# Altium PCB Copy of PCB1.PcbDoc
Units mil, origin at the board's own origin, x right, y up, seen from the top; angles counter-clockwise.
Board outline 2390 x 329.09 mil, 4 copper layers (Top Layer, Layer 2, Layer 3, Bottom Layer), stack 23.756 mil thick; 2 components, 3 nets, 9 pads, 0 vias.
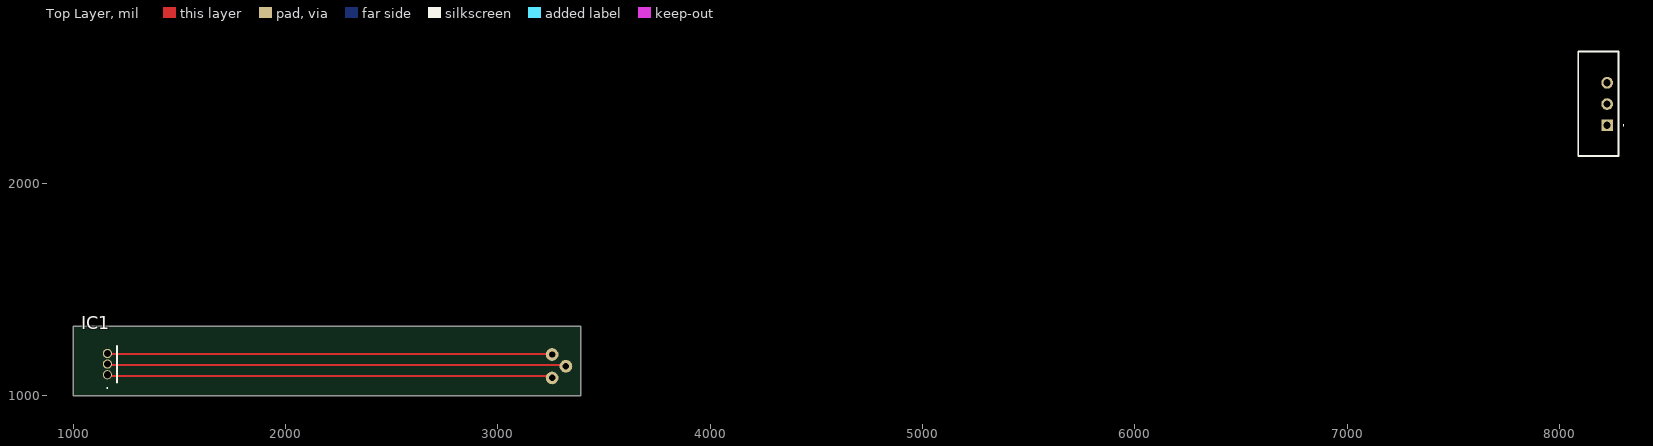
[diagram p0: Top Layer view]
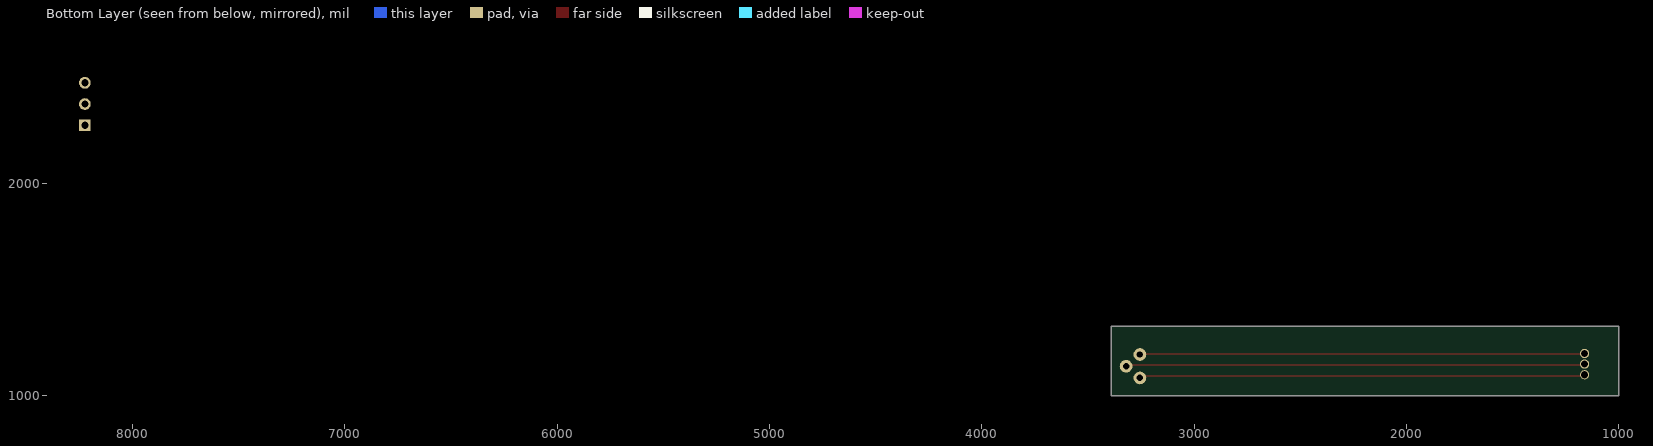
[diagram p1: Bottom Layer view, seen from below]
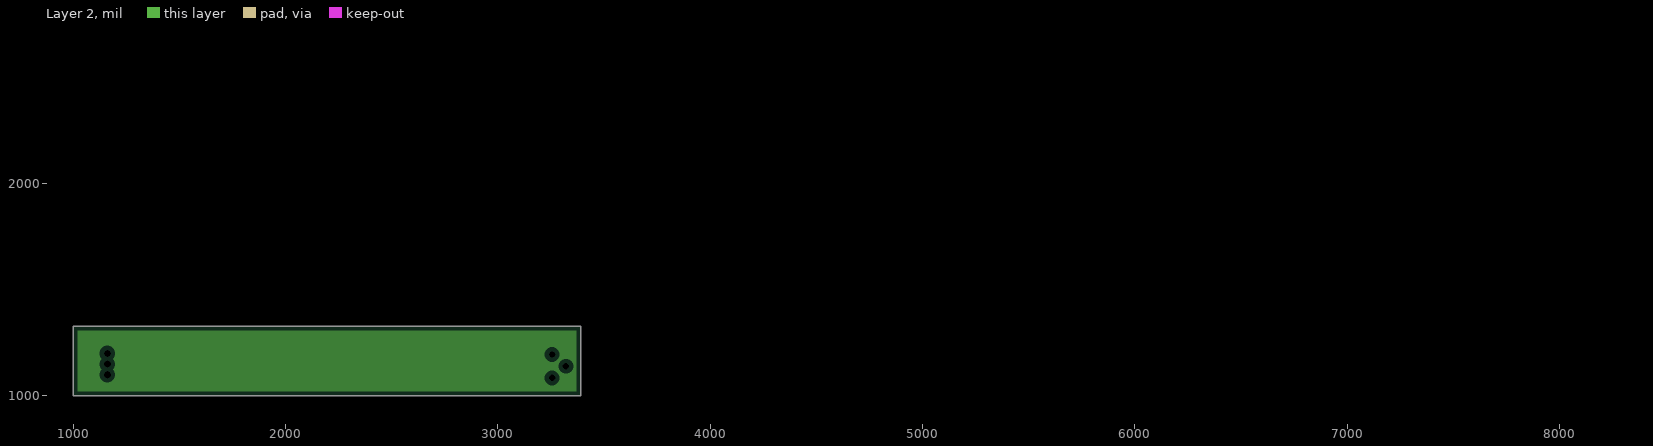
[diagram p2: Layer 2, clearances drawn from the general rule]
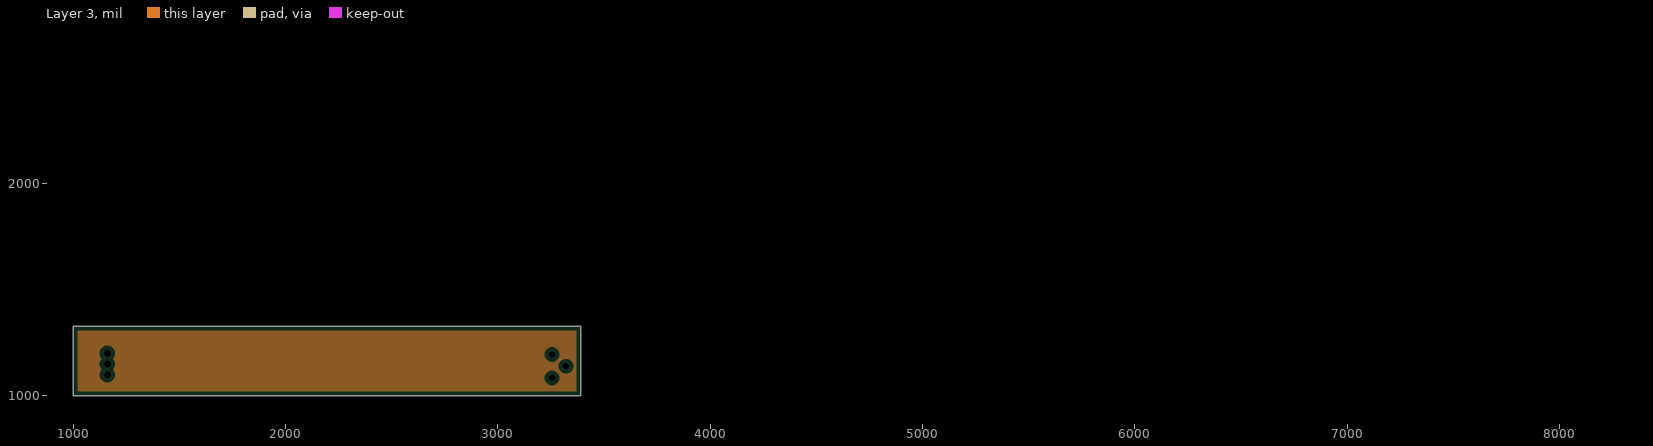
[diagram p3: Layer 3, clearances drawn from the general rule]

## Layer stack, top to bottom
Top Solder: solder mask 0.4724, FC-001, Dk 4
Top Solder: solder mask 0.4, Solder Resist, Dk 3.5
Top Layer: signal copper 1.4
Dielectric 2: prepreg 2.8, PP-006, Dk 4.1
Layer 2: plane copper 1.378
Dielectric 1: prepreg 12.6, FR-4, Dk 4.1
Layer 3: plane copper 1.378
Dielectric 3: prepreg 2.8, PP-006, Dk 4.1
Bottom Layer: signal copper 1.4
Stack2 Bottom Coverlay: solder mask 0.4, Solder Resist, Dk 3.5
Stack2 Bottom Coverlay: solder mask 0.4724, FC-001, Dk 4

## Board outline
1000,1000 3390,1000 3390,1329.09 1000,1329.09

## Design rules (kind name [scope] priority, off if disabled: settings)
Clearance [All] p1: gap=10 ignorepadtopadclearanceinfootprint=FALSE
DiffPairsRouting [All] p1: maxlimit=10 minlimit=10 mostfreqgap=10 toplayer_minwidth=15 toplayer_maxwidth=15 toplayer_prefwidth=15 bottomlayer_minwidth=15 bottomlayer_maxwidth=15 bottomlayer_prefwidth=15 substack1={582C9589-BA87-4CC7-94C1-6AA3926CDF40} toplayer_{582c9589-ba87-4cc7-94c1-6aa3926cdf40}_minwidth=15 toplayer_{582c9589-ba87-4cc7-94c1-6aa3926cdf40}_maxwidth=15 toplayer_{582c9589-ba87-4cc7-94c1-6aa3926cdf40}_prefwidth=15 bottomlayer_{582c9589-ba87-4cc7-94c1-6aa3926cdf40}_minwidth=15 bottomlayer_{582c9589-ba87-4cc7-94c1-6aa3926cdf40}_maxwidth=15 bottomlayer_{582c9589-ba87-4cc7-94c1-6aa3926cdf40}_prefwidth=15 maxuncoupledlength=500
PlaneClearance [All] p1: clearance=20
PlaneConnect [All] p1: planeconnectstyle=Relief reliefexpansion=20 reliefentries=4 reliefconductorwidth=10 reliefairgap=10
PolygonConnect [All] p1: connectstyle=Relief reliefconductorwidth=10 reliefentries=4 polygonreliefangle="90 Angle" airgapwidth=10
RoutingVias [All] p1: holewidth=28 width=50 viastyle="Through Hole" minholewidth=28 minwidth=50 maxholewidth=28 maxwidth=50
SolderMaskExpansion [All] p1: expansion=4 istentingtop=FALSE
Width [All] p1: maxlimit=10 minlimit=10 preferedwidth=10 substack1={582C9589-BA87-4CC7-94C1-6AA3926CDF40}
27 further rules are at their usual default settings.

## Classes and differential pairs
component class Sheet2: IC1

## Components (designator, comment, footprint, x,y, rotation, side; value= is the part's Value field where it differs from the comment)
IC1 "DS18B20+" DS18B20 1160,1150 r90 top
J1 "5-520315-3" 55203153 8225,2275 r90 top

## Footprints (in the part's own frame and the unit in brackets; to place one, negate y for a bottom-side part, rotate by r counter-clockwise, add the part's x,y. Pads: shape width x height; smd on the part's side, far side on the other; paste and mask are expansions set on the pad)
55203153 [mil]
  rect 55.24x55.24 hole 34: 1(0,0)
  round 55.24 hole 34: 2(100,0) 3(200,0)
  silkscreen extent -145,-79 348,136, body extent -141,-54 337,119, height 359
DS18B20 [mm]
  round 1.1 hole 0.85: 1(-1.27,0) 2(0,0) 3(1.27,0)
  silkscreen extent -2.9,-1.14 2.2,0.05, body extent -2.84,-1.1 2.97,3.08, height 5.33

## Part data
IC1: "Integrated Circuit", Manufacturer_Name="Analog Devices", Mouser Part Number=700-DS18B20+, Arrow Part Number=DS18B20+, Arrow Price/Stock=https://www.arrow.com/en/products/ds18b20/analog-devices?utm_currency=USD&region=nac, Datasheet Link=https://ms.componentsearchengine.com/Datasheets/2/DS18B20+.pdf, Height=4.95mm, Manufacturer_Part_Number=DS18B20+, Mouser Price/Stock=https://www.mouser.co.uk/ProductDetail/Analog-Devices-Maxim-Integrated/DS18B20%2b?qs=7H2Jq%252ByxpJKegCKabDbglA%3D%3D
J1: "Connector", Manufacturer_Name="TE Connectivity", Mouser Part Number=571-5-520315-3, Arrow Part Number=5-520315-3, Arrow Price/Stock=https://www.arrow.com/en/products/5-520315-3/te-connectivity?utm_currency=USD&region=nac, Datasheet Link=https://www.te.com/commerce/DocumentDelivery/DDEController?Action=showdoc&DocId=Customer+Drawing%7F520315%7FU4%7Fpdf%7FEnglish%7FENG_CD_520315_U4.pdf%7F5-520315-3, Height=6.93mm, Manufacturer_Part_Number=5-520315-3, Mouser Price/Stock=https://www.mouser.co.uk/ProductDetail/TE-Connectivity-AMP/5-520315-3?qs=lnVw2K6okukuuQdbziEh6w%3D%3D

## Free pads (board coordinates)
  round 60 hole 30: 1(3255,1195) 3(3320,1140) 4(3255,1085)

## Nets (pads, with @x,y where several pads share a name; then routed paths per layer and width w, separated by ;. In a path a pad name is that pad's centre, name@x,y a point inside that pad or via, vN(x,y) a via of type N, cw(c..) or ccw(c..) an arc to the next point about the centre after c; other vN are vias at no path point)
DQ: IC1.2 pad.3 | length 2164.1
  Top Layer w10: IC1.2 1165,1145 3315,1145 pad.3
GND: IC1.1 pad.4 | length 2101.2
  Top Layer w10: IC1.1 1166.37,1093.63 3246.37,1093.63 pad.4
VDD: IC1.3 pad.1 | length 2097.1
  Top Layer w10: IC1.3 1162.5,1197.5 3252.5,1197.5 pad.1
pads on no net: J1.1 J1.2 J1.3

## Polygon pours and split planes (outlines as drawn)
no net on Layer 2 (split plane): 3369.9,1020.1 1020.1,1020.1 1020.1,1308.99 3369.9,1308.99
no net on Layer 3 (split plane): 3369.9,1020.1 1020.1,1020.1 1020.1,1308.99 3369.9,1308.99